# Altium PCB InWall_PCB2.PcbDoc
Units mm, origin at the board's own origin, x right, y up, seen from the top; angles counter-clockwise.
Board outline 33.7 x 33.7 mm, 2 copper layers (Top Layer, Bottom Layer); 34 components, 20 nets, 125 pads, 0 vias.
Unrouted connection lines stored in the file: 75.
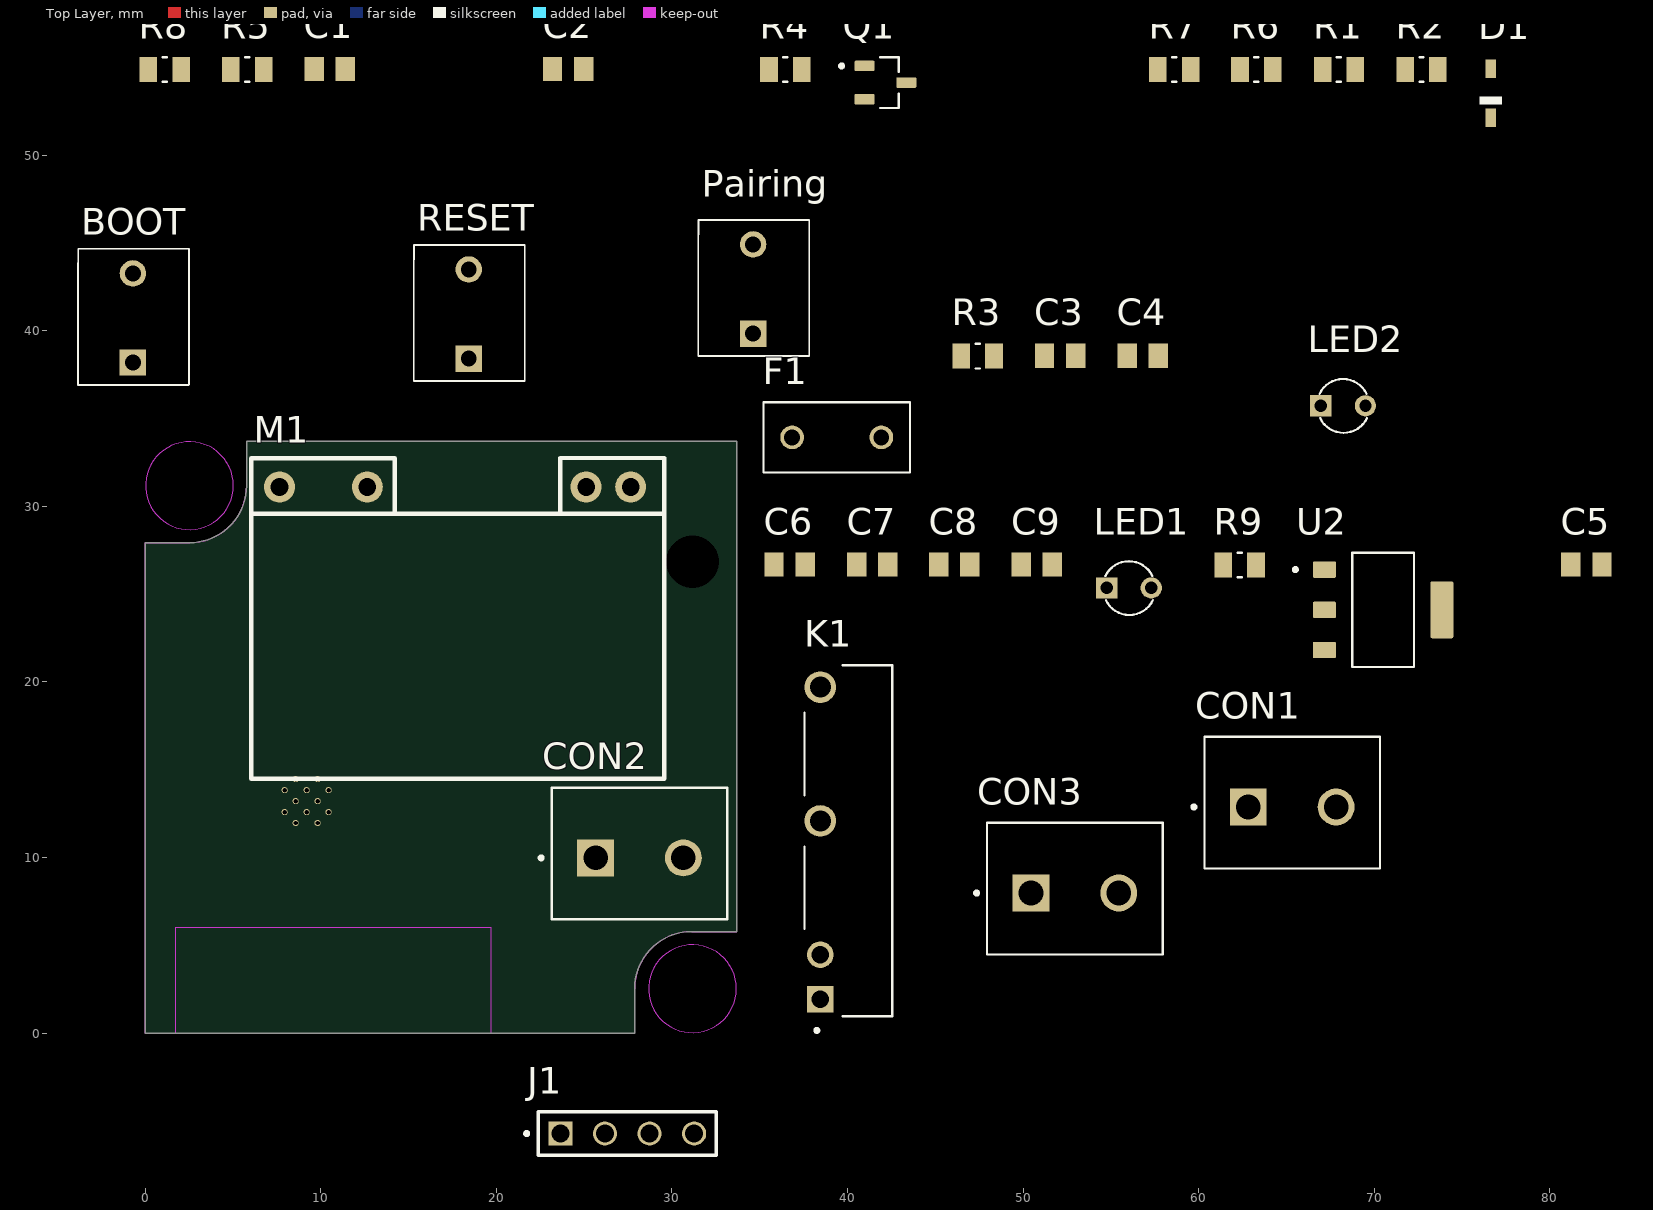
[diagram p0: Top Layer view]
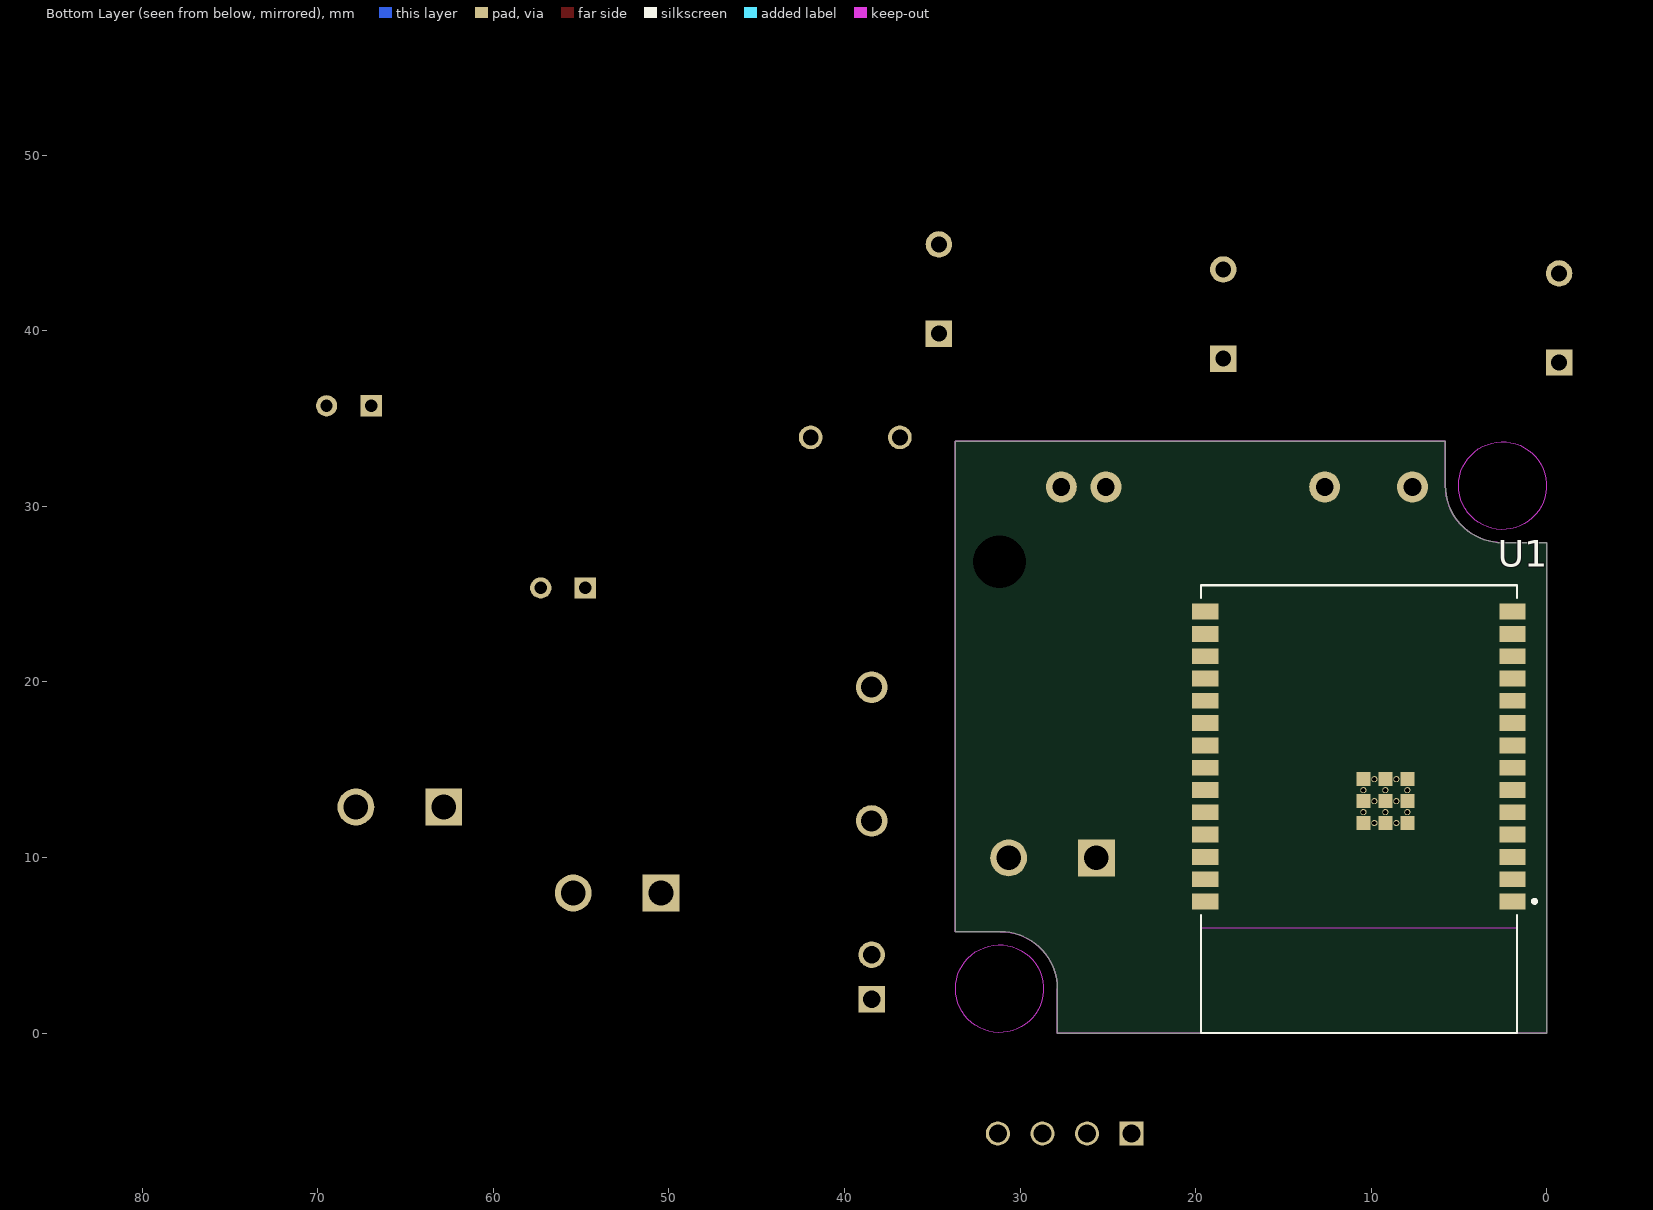
[diagram p1: Bottom Layer view, seen from below]

## Layer stack, top to bottom
Top Solder: solder mask 0.0102, Solder Resist, Dk 3.5
Top Layer: signal copper 0.0356
Dielectric 1: dielectric 0.32, FR-4, Dk 4.8
Bottom Layer: signal copper 0.0356
Bottom Solder: solder mask 0.0102, Solder Resist, Dk 3.5

## Board outline
0,0 0,27.925 2.525,27.925 ccw(c2.525,31.175) 5.775,31.175 5.775,33.7 33.7,33.7 33.7,5.775 31.125,5.775 ccw(c31.125,2.525) 27.875,2.525 27.875,0

## Design rules (kind name [scope] priority, off if disabled: settings)
Clearance [All] p1: gap=0.254 ignorepadtopadclearanceinfootprint=FALSE except(0: Arc-Hole Track-Hole SMDPad-Hole THPad-Hole Via-Hole Fill-Hole Poly-Hole Region-Hole Text-Hole)
PolygonConnect [All] p1: connectstyle=Relief reliefconductorwidth=0.254 reliefentries=4 polygonreliefangle="90 Angle" airgapwidth=0.254
RoutingVias [All] p1: holewidth=0.711 width=1.27 viastyle="Through Hole" minholewidth=0.711 minwidth=1.27 maxholewidth=0.711 maxwidth=1.27
SolderMaskExpansion [All] p1: expansion=0.102 istentingtop=FALSE
Width [All] p1: maxlimit=0.254 minlimit=0.254 preferedwidth=0.254
30 further rules are at their usual default settings.

## Components (designator, comment, footprint, x,y, rotation, side; value= is the part's Value field where it differs from the comment)
BOOT "Push Button" "Push Button" -0.7,40.725 r0 top
C1 "100 nF" CAPC2012X90N 10.51,54.903 r0 top
C2 "100 nF" CAPC2012X90N 24.086,54.903 r0 top
C3 "100 nF/ 50V" CAPC2012X90N 52.107,38.578 r0 top
C4 "10 uF/ 25V" CAPC2012X90N 56.808,38.578 r0 top
C5 "100 nF/ 50V" CAPC2012X90N 82.08,26.678 r0 top
C6 "100 nF" CAPC2012X90N 36.703,26.678 r0 top
C7 "10 uF/ 25V" CAPC2012X90N 41.403,26.678 r0 top
C8 "10 uF/ 25V" CAPC2012X90N 46.078,26.678 r0 top
C9 "100 nF" CAPC2012X90N 50.779,26.678 r0 top
CON1 "KF301-2P" HANDSON_KF301-2P 65.325,12.875 r0 top
CON2 "KF301-2P" HANDSON_KF301-2P 28.15,9.975 r0 top
CON3 "KF301-2P" HANDSON_KF301-2P 52.95,7.975 r0 top
D1 "1N4148WS" SODFL2512X100N 76.638,53.527 r90 top
F1 "0697H1000-02" FUSRR508W60L835T400H810 39.385,33.925 r180 top
J1 "HTSW-104-07-G-S" SAMTEC_HTSW-104-07-G-S 27.455,-5.725 r180 top
K1 "HF49FD/005-1H12T" RELAY_HF49FD/005-1H12T 40.05,10.95 r90 top
LED1 "LED_Power" LEDRD254W50D305H520P 56.029,25.352 r0 top
LED2 "LED_Switch" LEDRD254W50D305H520P 68.225,35.725 r0 top
M1 "WX_DC12003" WX-DC12003 27.65,31.1 r180 top
Pairing "Push Button" "Push Button" 34.625,42.375 r0 top
Q1 "AO3400-5.8A" SOT95P260X140-3N 42.162,54.128 r0 top
R1 "10K" RESC2012X65N 67.988,54.878 r0 top
R2 "10K" RESC2012X65N 72.688,54.878 r0 top
R3 "3.3K" RESC2012X65N 47.407,38.553 r0 top
R4 "100 Ohm" RESC2012X65N 36.461,54.878 r0 top
R5 "10K" RESC2012X65N 5.81,54.878 r0 top
R6 "10K" RESC2012X65N 63.288,54.878 r0 top
R7 "10K" RESC2012X65N 58.613,54.878 r0 top
R8 "330" RESC2012X65N 1.11,54.878 r0 top
R9 "330" RESC2012X65N 62.329,26.653 r0 top
RESET "Push Button" "Push Button" 18.425,40.95 r0 top
U1 "ESP32-C6-WROOM-1-N8" XCVR_ESP32-C6-WROOM-1-N8 10.7,12.75 r0 bottom
U2 "AMS1117-3.3" SOT229P700X180-4N 70.505,24.102 r0 top

## Footprints (in the part's own frame and the unit in brackets; to place one, negate y for a bottom-side part, rotate by r counter-clockwise, add the part's x,y. Pads: shape width x height; smd on the part's side, far side on the other; paste and mask are expansions set on the pad)
CAPC2012X90N [mm]
  rect 1.1x1.38 smd: 1(-0.885,0) 2(0.885,0)
  body extent -1,-0.63 1,0.63, height 0.9
FUSRR508W60L835T400H810 [mm]
  round 1.35 hole 0.9: 1(-2.54,0) 2(2.54,0)
  silkscreen extent -4.18,-2 4.18,2, body extent -4.18,-2 4.18,2, height 8.1
HANDSON_KF301-2P [mm]
  rect 2.1x2.1 / inner round 2.1 / far side rect 2.1x2.1 hole 1.4: 1(-2.5,0)
  round 2.1 hole 1.4: 2(2.5,0)
  silkscreen extent -5.7,-3.5 5,4, body extent -5.6,-3.75 5,3.75, height 10
LEDRD254W50D305H520P [mm]
  rect 1.208x1.208 / inner round 1.208 / far side rect 1.208x1.208 hole 0.7: A(-1.27,0)
  round 1.208 hole 0.7: C(1.27,0)
  silkscreen extent -1.34,-1.54 1.36,1.52, body extent -1.59,-1.9 1.91,1.9, height 6.71
"Push Button" [mm]
  rect 1.5x1.5 hole 0.9: 1(0,-2.54)
  round 1.5 hole 0.9: 2(0,2.54)
  silkscreen extent -3.13,-3.81 3.19,3.94
RELAY_HF49FD/005-1H12T [mm]
  rect 1.508x1.508 hole 1: 1(-9.03,1.6)
  round 1.508 hole 1: 2(-6.49,1.6)
  round 1.8 hole 1.2: 3(1.13,1.6) 4(8.75,1.6)
  silkscreen extent -10.9,-2.5 10,2.5
RESC2012X65N [mm]
  rect 1x1.42 smd: 1(-0.935,0) 2(0.935,0)
  silkscreen extent -0.12,-0.7 0.12,0.7, body extent -1,-0.63 1,0.63, height 0.65
SAMTEC_HTSW-104-07-G-S [mm]
  rect 1.37x1.37 / inner round 1.37 / far side rect 1.37x1.37 hole 1.02: 01(3.81,0)
  round 1.37 hole 1.02: 02(1.27,0) 03(-1.27,0) 04(-3.81,0)
  silkscreen extent -5.08,-1.24 5.83,1.24
SODFL2512X100N [mm]
  rect 1.05x0.6 smd: A(1.4,0) C(-1.4,0)
  silkscreen extent -0.63,-0.63 -0.2,0.63, body extent -1.25,-0.63 1.25,0.63, height 1.1
SOT95P260X140-3N [mm]
  rrect25% 1.14x0.6 smd: 1(-1.19,0.95) 2(-1.19,-0.95) 3(1.19,0)
  silkscreen extent -2.6,-1.45 0.75,1.45, body extent -1.3,-1.45 1.3,1.45, height 1.4
SOT229P700X180-4N [mm]
  rrect15% 1.31x0.93 smd: 1(-3.345,2.29) 2(-3.345,0) 3(-3.345,-2.29)
  rrect15% 1.31x3.24 smd: 4(3.345,0)
  silkscreen extent -5.1,-3.25 1.75,3.25, body extent -3.25,-3.5 3.25,3.5, height 1.8
WX-DC12003 [mm] "220V AC to 5V DC converter"
  round 1.77 hole 1: 1(0,0) 2(2.54,0) 3(15,0) 4(20,0)
  silkscreen extent -1.9,-1.65 21.6,16.63
XCVR_ESP32-C6-WROOM-1-N8 [mm]
  rect 1.5x0.9 smd: 1(-8.75,5.26) 2(-8.75,3.99) 3(-8.75,2.72) 4(-8.75,1.45) 5(-8.75,0.18) 6(-8.75,-1.09) 7(-8.75,-2.36) 8(-8.75,-3.63) 9(-8.75,-4.9) 10(-8.75,-6.17) 11(-8.75,-7.44) 12(-8.75,-8.71) 13(-8.75,-9.98) 14(-8.75,-11.25) 15(8.75,-11.25) 16(8.75,-9.98) 17(8.75,-8.71) 18(8.75,-7.44) 19(8.75,-6.17) 20(8.75,-4.9) 21(8.75,-3.63) 22(8.75,-2.36) 23(8.75,-1.09) 24(8.75,0.18) 25(8.75,1.45) 26(8.75,2.72) 27(8.75,3.99) 28(8.75,5.26)
  rect 0.8x0.8 smd: 29_1(-2.755,0.79) 29_2(-1.505,0.79) 29_3(-0.255,0.79) 29_4(-2.755,-0.46) 29_5(-1.505,-0.46) 29_6(-0.255,-0.46) 29_7(-2.755,-1.71) 29_8(-1.505,-1.71) 29_9(-0.255,-1.71)
  round 0.35 hole 0.25 mask+0: 30_1(-2.13,0.79) 30_2(-0.88,0.79) 30_3(-2.755,0.165) 30_4(-1.505,0.165) 30_5(-0.255,0.165) 30_6(-2.13,-0.46) 30_7(-0.88,-0.46) 30_8(-2.755,-1.085) 30_9(-1.505,-1.085) 30_10(-0.255,-1.085) 30_11(-2.13,-1.71) 30_12(-0.88,-1.71)
  Keep-Out Layer region: 9,6.75 -9,6.75 -9,12.75 9,12.75
  silkscreen extent -10.1,-12.75 9,12.75, body extent -9,-12.75 9,12.75, height 3.25

## Part data
C1 C2 C3 C4 C5 C6 C7 C8 C9: library part VJ0805Y104KXXCW1BC, "Capacitor: ceramic; MLCC; 100nF; 25V; X7R; Â±10%; SMD; 0805", Package="0805-2 VISHAY", Check_prices=https://www.snapeda.com/parts/VJ0805Y104KXXCW1BC/Vishay/view-part/?ref=eda, MF="Vishay Vitramon", MP=VJ0805Y104KXXCW1BC, SnapEDA_Link=https://www.snapeda.com/parts/VJ0805Y104KXXCW1BC/Vishay/view-part/?ref=snap
CON1 CON2 CON3: "2 Pin Terminal Block 5mm Pitch", Package=None, Check_prices=https://www.snapeda.com/parts/KF301-2P/Handson+Technology/view-part/?ref=eda, MF="Handson Technology", MP=KF301-2P, SnapEDA_Link=https://www.snapeda.com/parts/KF301-2P/Handson+Technology/view-part/?ref=snap
D1: "Diode Standard 75V 300mA (DC) Surface Mount SOD-323", Package="SOD-323FL-2 ON Semiconductor", Availability="In Stock", MF="ON Semiconductor", MP=1N4148WS, Price=None, Purchase-URL=https://pricing.snapeda.com/search/part/1N4148WS/?ref=eda
F1: "2-Pin Radial Fuse", Package="Radial Box  Bel Fuse", Check_prices=https://www.snapeda.com/parts/0697H1000-02/Bel+Circuit+Protection/view-part/?ref=eda, MF="Bel Fuse", MP=0697H1000-02, SnapEDA_Link=https://www.snapeda.com/parts/0697H1000-02/Bel+Circuit+Protection/view-part/?ref=snap
J1 Q1: Package=None, Availability=Unavailable, Price=None
  J1: MP=HTSW-104-07-G-S
  Q1: MF="{'manufacturer': u'MDD'}", MP=AO3400-5.8A
K1: "Relay: electromagnetic; SPST-NO; Ucoil: 5VDC; 5A/250VAC; 5A/30VDC", Package=None, Availability=Unavailable, MF=Hongfa, MP=HF49FD/005-1H12T, Price=None, SnapEDA_Link=https://www.snapeda.com/parts/HF49FD/005-1H12T/Hongfa/view-part/2753221/?ref=snap
LED1 LED2: library part OVLAW4CB7, "Ovlaw4Cb7 White LED 3mm (T-1) Round Lens Through Hole Package", Package=Package, Check_prices=https://www.snapeda.com/parts/OVLAW4CB7/TT+Electronics%252FOptek/view-part/?ref=eda, MF="TT Electronics/Optek", MP=OVLAW4CB7, SnapEDA_Link=https://www.snapeda.com/parts/OVLAW4CB7/TT+Electronics%252FOptek/view-part/?ref=snap
R1 R2 R3 R4 R5 R6 R7 R8 R9: library part RN73C2A5K11BTD, "RES SMD 5.11KOHM 0.1% 1/10W 0805", Package=0805, Power_Rating=".1 W", Resistance=5.11K, Tolerance=.1%, Check_prices=https://www.snapeda.com/parts/RN73C2A5K11BTD/TE+Connectivity+Passive+Product/view-part/?ref=eda, EU_RoHS_Compliance=Compliant, MF="TE Connectivity", MP=RN73C2A5K11BTD, SnapEDA_Link=https://www.snapeda.com/parts/RN73C2A5K11BTD/TE+Connectivity+Passive+Product/view-part/?ref=snap
U1: "Multiprotocol Modules ESP32-C6 module, Wi-Fi 6 in 2.4 GHz band, Bluetooth 5, Zigbee 3.0 and Thread. ESP34-WROOM Compatible - ENGINEERING SAMPLE", Package="SMD-28 Espressif Systems", Check_prices=https://www.snapeda.com/parts/ESP32-C6-WROOM-1-N8/Espressif+Systems/view-part/?ref=eda, MF="Espressif Systems", MP=ESP32-C6-WROOM-1-N8, SnapEDA_Link=https://www.snapeda.com/parts/ESP32-C6-WROOM-1-N8/Espressif+Systems/view-part/?ref=snap
U2: "Sot223/Pkg 1-Amp 3.3-Volt Low Drop Out Voltage Regulatator", Package="SOT-223 Seeed Technology", Check_prices=https://www.snapeda.com/parts/AMS1117-3.3/Advanced+Monolithic+Systems/view-part/?ref=eda, MF="Advanced Monolithic Systems", MP=AMS1117-3.3, SnapEDA_Link=https://www.snapeda.com/parts/AMS1117-3.3/Advanced+Monolithic+Systems/view-part/?ref=snap

## Free pads (board coordinates)
  round 0 hole 3: 2(31.175,26.85)

## Nets (pads, with @x,y where several pads share a name; then routed paths per layer and width w, separated by ;. In a path a pad name is that pad's centre, name@x,y a point inside that pad or via, vN(x,y) a via of type N, cw(c..) or ccw(c..) an arc to the next point about the centre after c; other vN are vias at no path point)
3V3: C3.2 C4.2 C8.2 C9.2 CON2.1 J1.01 R1.1 R2.1 R3.2 R6.1 R9.1 U1.2 U2.2
5V: C5.2 C6.2 C7.2 D1.C K1.1 M1.2 U2.3
BOOT: BOOT.1 C2.2 R2.2 U1.15
EN: C1.2 R1.2 RESET.1 U1.3
GND: BOOT.2 C1.1 C2.1 C3.1 C4.1 C5.1 C6.1 C7.1 C8.1 C9.1 J1.04 LED1.C LED2.C M1.1 Pairing.2 Q1.2 R5.1 R7.2 RESET.2 U1.1 U1.28 U1.29_1 U1.29_2 U1.29_3 U1.29_4 U1.29_5 U1.29_6 U1.29_7 U1.29_8 U1.29_9 U2.1
L_out: CON3.1 K1.3
LED: R8.1 U1.20
NetD1_A: D1.A K1.2 Q1.3
NetF1_2: F1.2 M1.4
NetLED1_A: LED1.A R9.2
NetLED2_A: LED2.A R8.2
NetQ1_1: Q1.1 R4.2 R5.2
NetR3_1: R3.1 U1.10
NULL: CON1.1 CON3.2 M1.3
Pairing: Pairing.1 R6.2 U1.21
Phase: CON1.2 F1.1 K1.4
Relay_Signal: R4.1 U1.19
RXD: J1.02 U1.24
S1: CON2.2 R7.1 U1.18
TXD: J1.03 U1.25
pads on no net: U1.4 U1.5 U1.6 U1.7 U1.8 U1.9 U1.11 U1.12 U1.13 U1.14 U1.16 U1.17 U1.22 U1.23 U1.26 U1.27 U1.30_1 U1.30_2 U1.30_3 U1.30_4 U1.30_5 U1.30_6 U1.30_7 U1.30_8 U1.30_9 U1.30_10 U1.30_11 U1.30_12 U2.4

## Keep-outs
Keep-Out Layer:
  circle w0.05: c2.525,31.175 r2.5
  circle w0.05: c31.175,2.525 r2.5
  lines w0.05: 0,27.925 0,27.925 ; 0,27.925 0,0 27.875,0 27.875,2.525 cw(c31.125,2.525) 31.125,5.775 33.7,5.775 33.7,33.7 5.775,33.7 5.775,31.175 cw(c2.525,31.175) 2.525,27.925 0,27.925 ; 0,27.925 0,27.925